# Altium PCB HOL-Nova.PcbDoc
Units mil, origin at the board's own origin, x right, y up, seen from the top; angles counter-clockwise.
Board outline 1832 x 763.78 mil, 4 copper layers (Top Layer, Internal Plane 1, Internal Plane 2, Bottom Layer), stack 61.6 mil thick; 81 components, 40 nets, 278 pads, 61 vias.
Unrouted connection lines stored in the file: 1.
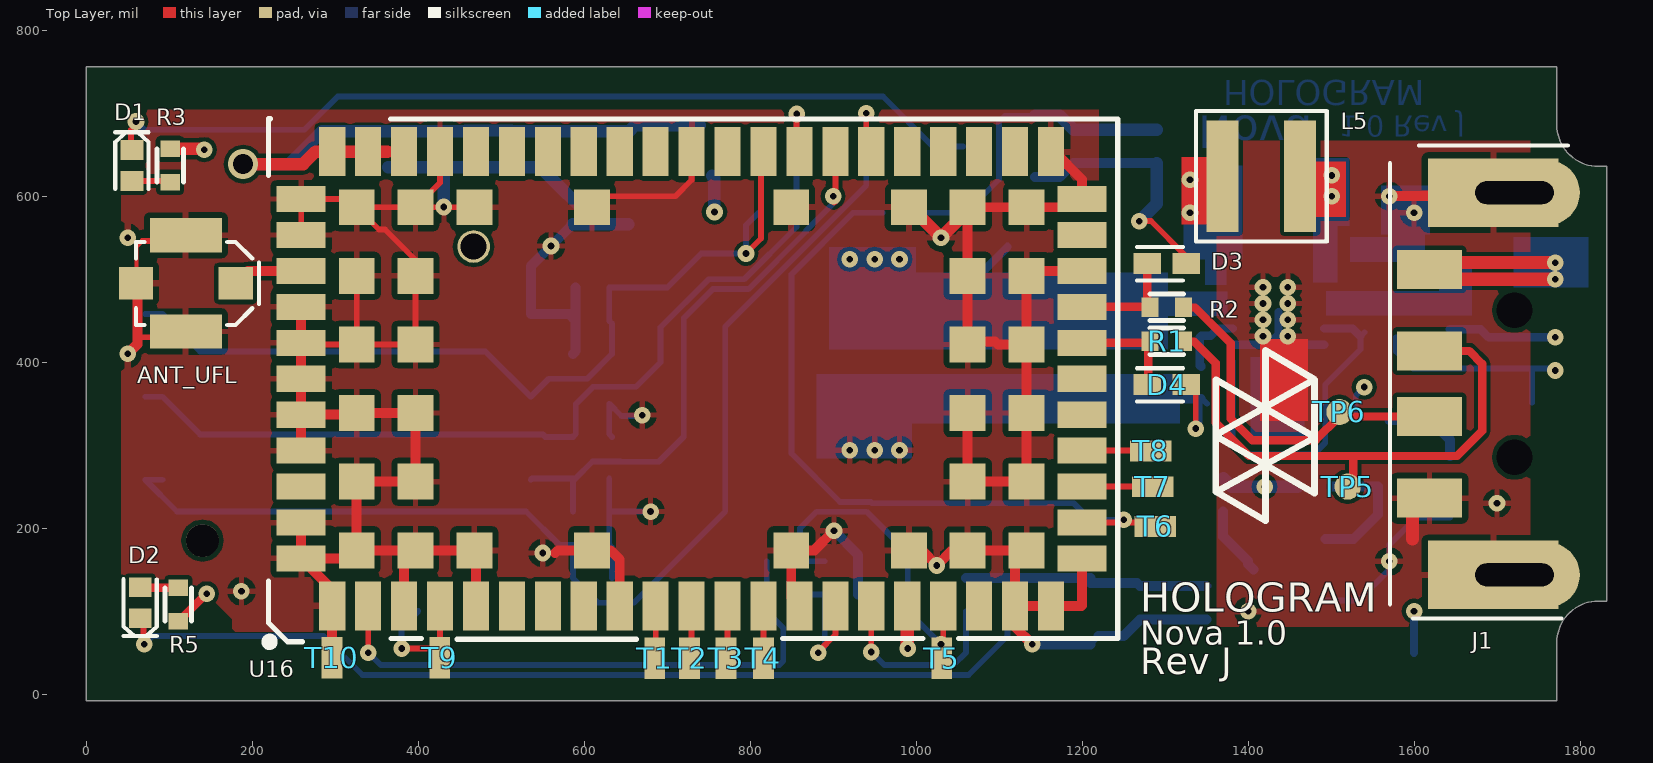
[diagram p0: Top Layer view]
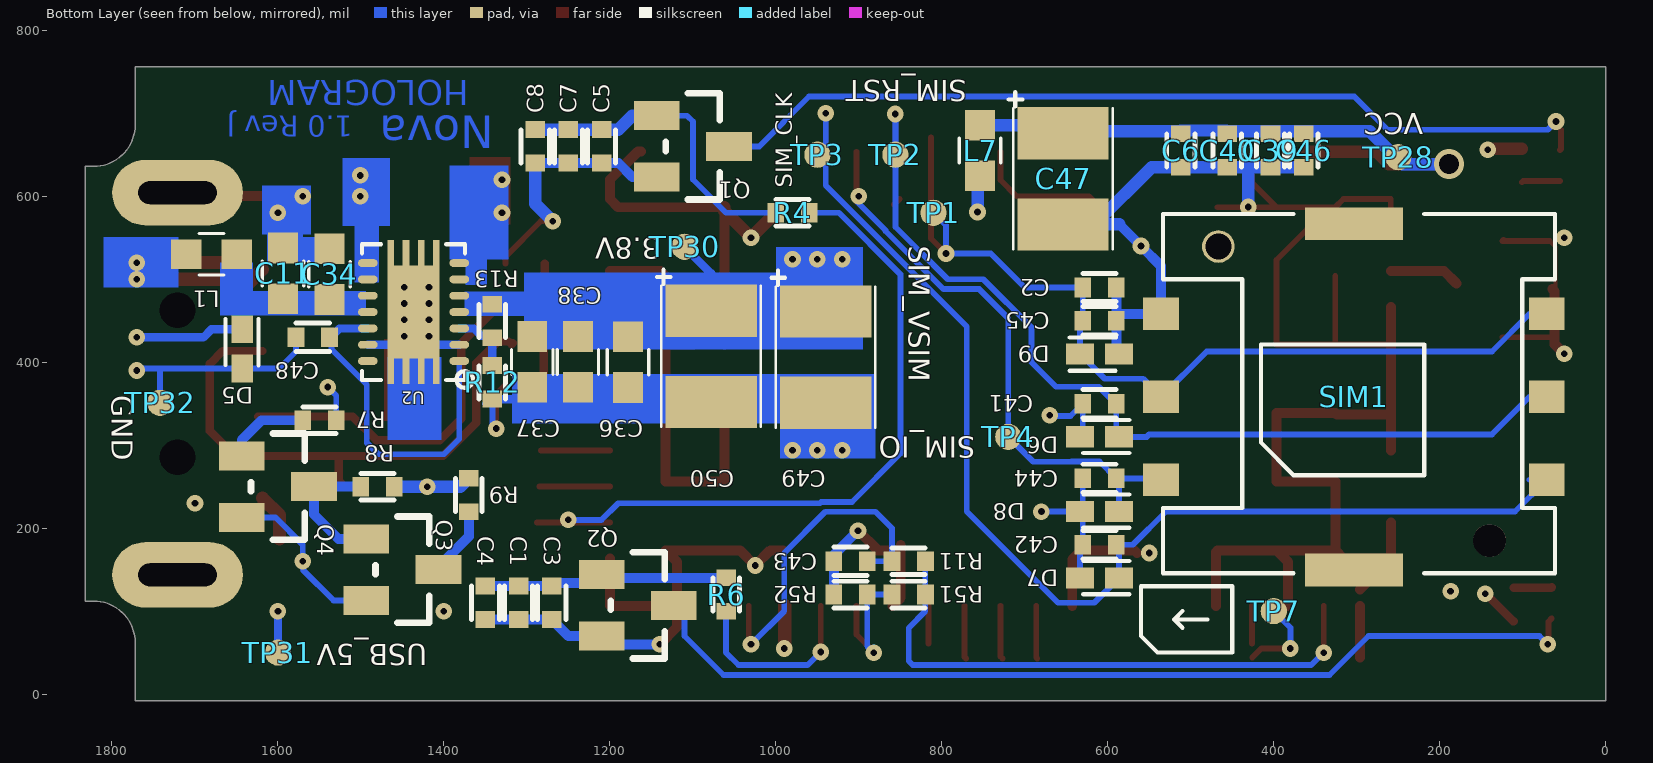
[diagram p1: Bottom Layer view, seen from below]
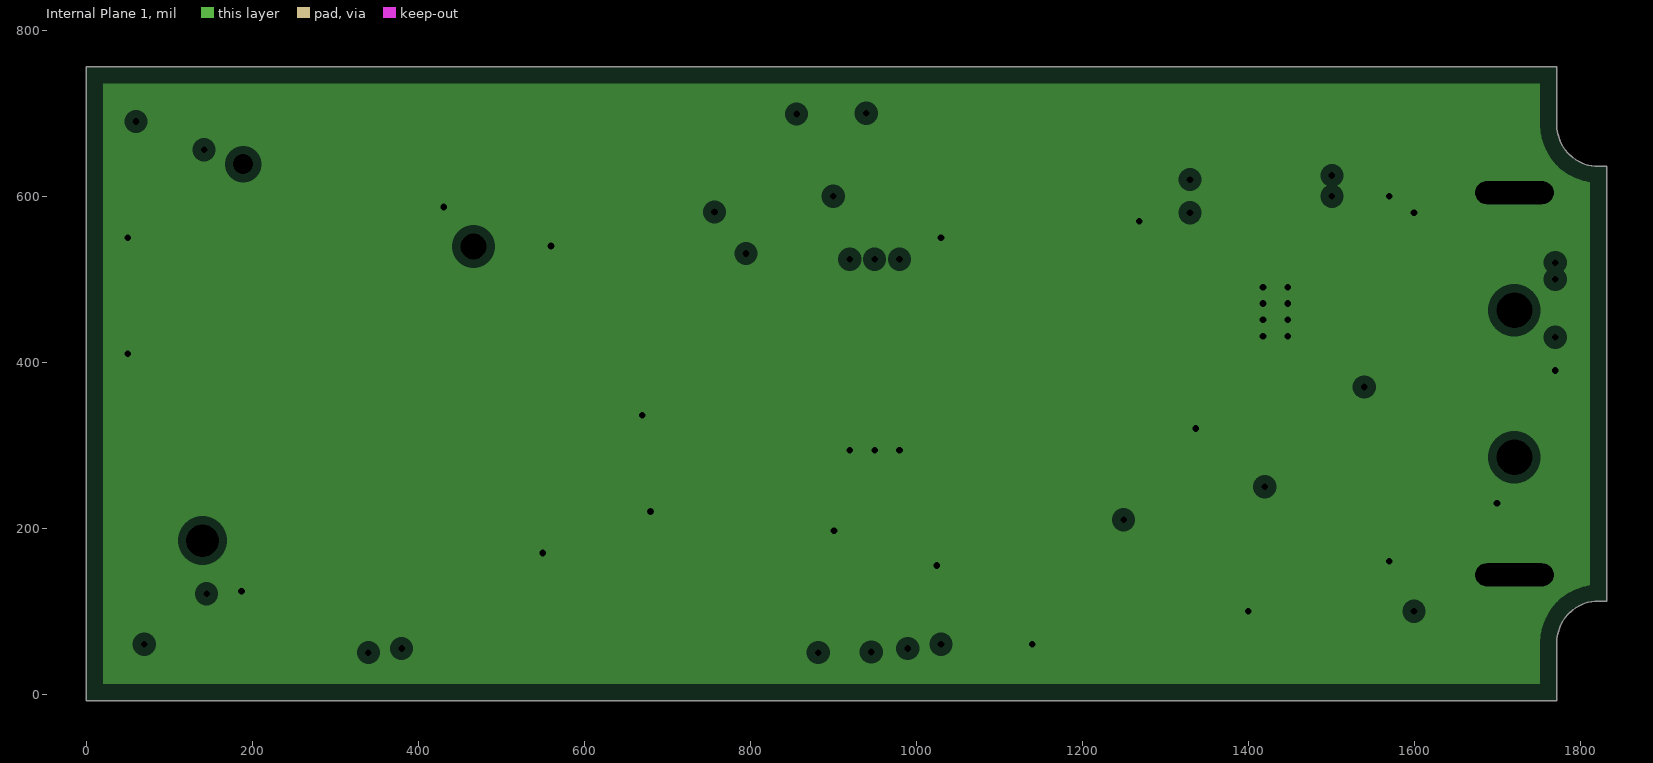
[diagram p2: Internal Plane 1, clearances drawn from the general rule]
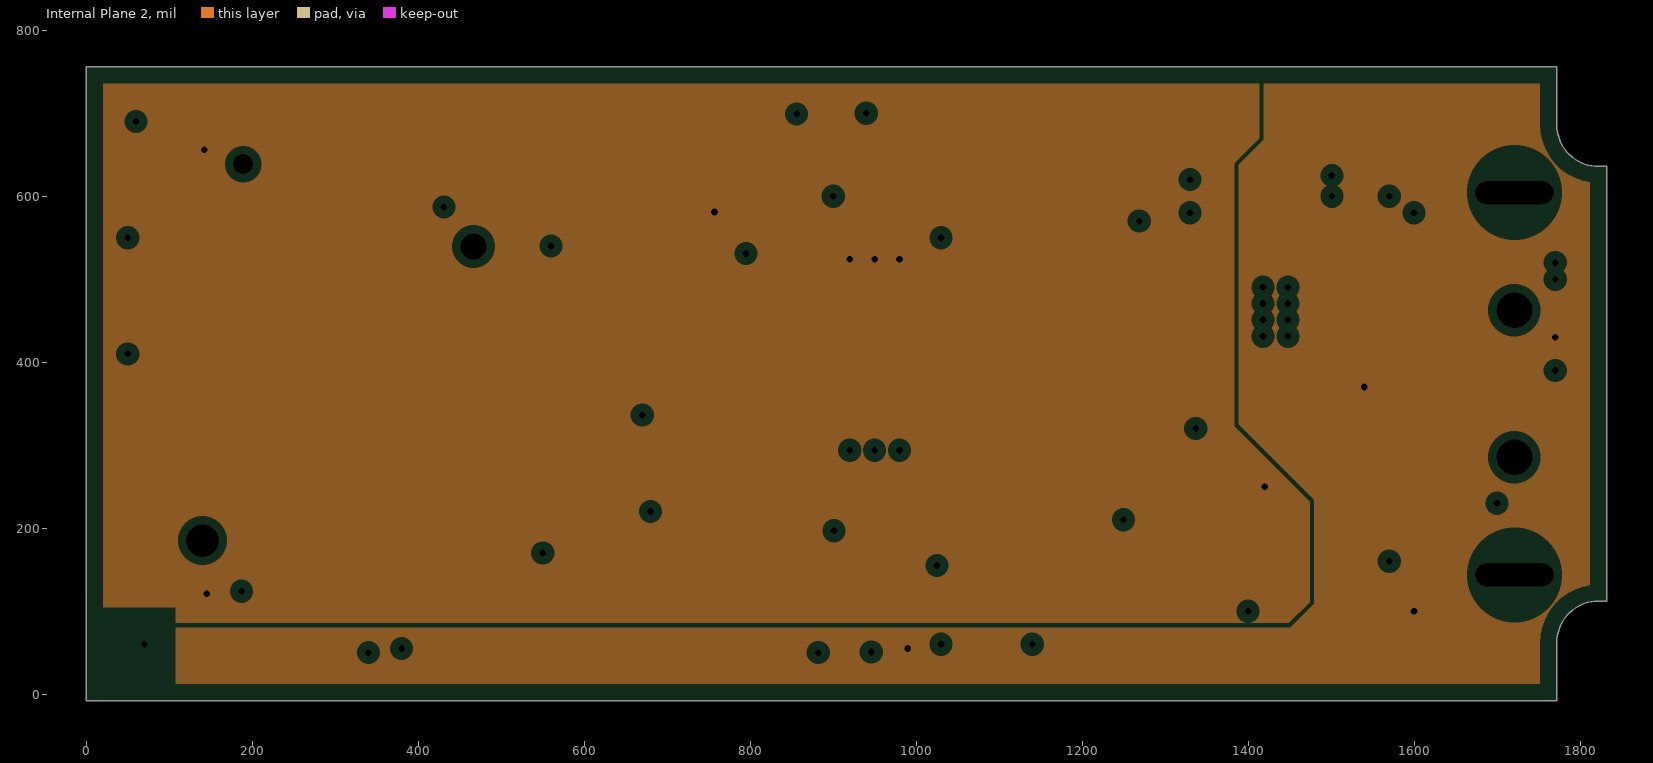
[diagram p3: Internal Plane 2, clearances drawn from the general rule]

## Layer stack, top to bottom
Top Solder: solder mask 0.4, Solder Resist, Dk 3.5
Top Layer: signal copper 1.4
Dielectric 1: prepreg 8, Dk 4.2
Internal Plane 1: plane copper 1.4, net GND
Dielectric 7: core 40, FR4, Dk 4.2
Internal Plane 2: plane copper 1.4, net (Multiple Nets)
Dielectric 6: prepreg 8, Dk 4.2
Bottom Layer: signal copper 1.4
Bottom Solder: solder mask 0.4, Solder Resist, Dk 3.5

## Board outline
0,-7.87 0,755.91 1772,755.91 1772,686 ccw(c1822,686) 1822,636 1832,636 1832,112 1822,112 ccw(c1822,62) 1772,62 1772,-7.87

## Design rules (kind name [scope] priority, off if disabled: settings)
Clearance Clearance_3 [(InComponent('TP13'))] p1: gap=0 ignorepadtopadclearanceinfootprint=FALSE
Clearance Clearance_4 [(InComponent('T1') or InComponent('T2') or InComponent('T3') or InComponent('T4') or InComponent('T5') or InComponent('T6') or InComponent('T7') or InComponent('T8') or InComponent('T10'))] p2: gap=0 ignorepadtopadclearanceinfootprint=FALSE
Clearance Clearance_2 [InComponent('TP20')] p3: gap=0 ignorepadtopadclearanceinfootprint=FALSE
Clearance Clearance_1 [(InNet('GND') AND InComponent('U10'))] p4: gap=5 ignorepadtopadclearanceinfootprint=FALSE except(0: Arc-Hole Track-Hole SMDPad-Hole THPad-Hole Via-Hole Fill-Hole Poly-Hole Region-Hole Text-Hole)
Clearance [All] p5: gap=5 ignorepadtopadclearanceinfootprint=FALSE except(0: Arc-Hole Track-Hole SMDPad-Hole THPad-Hole Via-Hole Fill-Hole Poly-Hole Region-Hole Text-Hole)
ComponentClearance ComponentClearance_2 [(InComponent('JRIGHT_A') OR InComponent('JRIGHT_B') OR InComponent('JRIGHT_C') OR InComponent('JLEFT_B') OR InComponent('JLEFT_A') OR InComponent('SIM1') OR InComponent('TP20') OR InComponent('TP14') OR InComponent('TP2') OR  InComponent('TP25') OR InComponent('TP13')    )] p1: gap=-10 collisioncheckmode=3 verticalgap=10 showdistances=FALSE
ComponentClearance ComponentClearance_1 [InComponent('U420')] p2: gap=-10 collisioncheckmode=3 verticalgap=10 showdistances=FALSE
ComponentClearance [All] p3: gap=10 collisioncheckmode=3 verticalgap=10 showdistances=FALSE
MinimumSolderMaskSliver [All] p1 off: minsoldermaskwidth=5
PlaneClearance [All] p1: clearance=10
PlaneConnect [All] p1: planeconnectstyle=Direct reliefexpansion=20 reliefentries=4 reliefconductorwidth=10 reliefairgap=10
PolygonConnect [All] p1: connectstyle=Relief reliefconductorwidth=7 reliefentries=4 polygonreliefangle="90 Angle" airgapwidth=7
RoutingVias [All] p1: holewidth=8 width=22 viastyle="Through Hole" minholewidth=7 minwidth=10 maxholewidth=100 maxwidth=100
SilkToSilkClearance [All] p1 off: silktosilkclearance=10
SilkToSolderMaskClearance [IsPad] p1 off: minsilkscreentomaskgap=10 clearancetoexposedcopper=TRUE
SolderMaskExpansion [All] p1: expansion=4
Width [All] p1: maxlimit=50 minlimit=5 preferedwidth=10 minimp=50.000000 maximp=50.000000 favimp=50.000000
24 further rules are at their usual default settings.

## Components (designator, comment, footprint, x,y, rotation, side; value= is the part's Value field where it differs from the comment)
ANT_UFL "ANT-A-1JB" UFL 120,495 r180 top
C1 "10 nF" CAP0402 1310,110 r270 bottom
C2 "0.1 uF" CAP0402 610,490 r180 bottom
C3 "56 pf" CAP0402 1270,110 r270 bottom
C4 "15 pf" CAP0402 1350,110 r270 bottom
C5 "10 nF" CAP0402 1210,660 r270 bottom
C6 "0.1 uF" CAP0402 512,655 r270 bottom
C7 "56 pf" CAP0402 1250,660 r270 bottom
C8 "15 pf" CAP0402 1290,660 r270 bottom
C11 "2.2 uF" CAP0603 1594,507 r270 bottom
C34 "10 uF" CAP0603 1538,506 r270 bottom
C36 "22 uF" CAP0603 1178,400 r90 bottom
C37 "22 uF" CAP0603 1293.63,400.37 r90 bottom
C38 "22 uF" CAP0603 1238.63,400.37 r90 bottom
C39 "10 nF" CAP0402 404,655 r270 bottom
C40 "56 pf" CAP0402 456,655 r270 bottom
C41 "47 pF" CAP0402 610,350 r0 bottom
C42 "47 pF" CAP0402 610,180 r0 bottom
C43 "47 pF" CAP0402 910,160 r0 bottom
C44 "47 pF" CAP0402 610,260 r0 bottom
C45 "47 pF" CAP0402 610,450 r180 bottom
C46 "15 pf" CAP0402 364,655 r270 bottom
C47 "330uF" CAP1210POL 654,621 r270 bottom
C48 "0.1 uF" CAP0402 1558,430 r0 bottom
C49 "330uF" CAP1210POL 940,406 r270 bottom
C50 "330uF" CAP1210POL 1078,407 r270 bottom
D1 "LED_0402_VLMB" LED_0402_VISHAY_VLMB 55,637 r270 top
D2 "LED_0402_VLMS" LED_0402_VISHAY_VLMS 65,110 r90 top
D3 "" PESD_0402 1302,519 r180 top
D4 "" PESD_0402 1302,373 r180 top
D5 "" PESD_0402 1643,416 r90 bottom
D6 "" PESD_0402 610,310 r180 bottom
D7 "" PESD_0402 610,140 r180 bottom
D8 "" PESD_0402 610,220 r180 bottom
D9 "" PESD_0402 610,410 r0 bottom
J1 "USB_A_PLUG_MOLEX_0480372200" "USB_A_PLUG_MOLEX_0480372200 - clipped_copper" 1721,374 r180 top locked
L1 "0 ohm" RES0603 1680,530 r180 bottom
L5 "1uH" COILCRAFT_XFL4020 1416,624 r180 top
L7 "FerriteBead 120ohm, 3A" RES0603 754,655 r90 bottom
Q1 "" SOT23 1100,660 r270 bottom
Q2 "" SOT23 1166.5,107 r270 bottom
Q3 "" SOT23 1450,150 r270 bottom
Q4 "" SOT23 1600,250 r270 bottom
R1 "22" RES0402 1302,425 r180 top
R2 "22" RES0402 1302,466 r180 top
R3 "3k" RES0402 101,637 r270 top
R4 "10K" RES0402 980,580 r0 bottom
R5 "3k" RES0402 111,108 r90 top
R6 "10K" RES0402 1060,120 r90 bottom
R7 "10K" RES0402 1550,330 r0 bottom
R8 "10K" RES0402 1480,250 r0 bottom
R9 "470" RES0402 1370,240 r270 bottom
R11 "100K" RES0402 840,160 r180 bottom
R12 "150k" RES0402 1341.63,375.63 r270 bottom
R13 "1M" RES0402 1341.63,449.63 r90 bottom
R51 "100K" RES0402 840,120 r180 bottom
R52 "100K" RES0402 910,120 r180 bottom
SIM1 "SIM_CARD_NANO" SIM_CARD_NANO 140,185 r90 bottom locked
T1 "TESTPAD" TESTPAD 685,43 r90 top locked
T2 "TESTPAD" TESTPAD 727,43 r90 top locked
T3 "TESTPAD" TESTPAD 771,43 r90 top locked
T4 "TESTPAD" TESTPAD 816,43 r90 top locked
T5 "TESTPAD" TESTPAD 1031,43 r90 top locked
T6 "TESTPAD" TESTPAD 1288,202 r0 top locked
T7 "TESTPAD" TESTPAD 1285,250 r0 top locked
T8 "TESTPAD" TESTPAD 1283,293 r0 top locked
T9 "TESTPAD" TESTPAD 426,44 r90 top locked
T10 "TESTPAD" TESTPAD 296,44 r90 top locked
TP1 "TPTP08R" TP08R 810,580 r90 bottom
TP2 "TPTP08R" TP08R 856,650 r90 bottom
TP3 "TPTP08R" TP08R 950,650 r90 bottom
TP4 "TPTP08R" TP08R 720,310 r90 bottom
TP5 "TPTP08R" TP08R 1520,250 r90 top
TP6 "TPTP08R" TP08R 1510,340 r90 top
TP7 "TPTP08R" TP08R 400,100 r90 bottom
TP28 "TPTP08R" TP08R 250,647 r90 bottom
TP30 "TPTP08R" TP08R 1110,539 r90 bottom
TP31 "TPTP08R" TP08R 1600,50 r90 bottom
TP32 "TPTP08R" TP08R 1742,351 r90 bottom
U2 "TPS63020" QFN-14-POWERPAD3X4DSJ 1436.63,460.37 r90 bottom
U16 "SARA-U2XX" SARA 296.4,106.38 r90 top locked

## Footprints (in the part's own frame and the unit in brackets; to place one, negate y for a bottom-side part, rotate by r counter-clockwise, add the part's x,y. Pads: shape width x height; smd on the part's side, far side on the other; paste and mask are expansions set on the pad)
CAP0402 [mm] "Chip Capacitor, 2-Leads, Body 1.00x0.50mm, IPC Medium Density"
  rect 0.515x0.6 smd: 1(-0.513,0) 2(0.513,0)
  silkscreen extent -0.51,-0.43 0.51,0.43, body extent -0.55,-0.3 0.55,0.3, height 0.6
CAP0603 [mil]
  rect 37x36 smd: 1(30.5,0) 2(-30.5,0)
  silkscreen extent -15,-25 15,25, body extent -39,-20 39,20, height 32
CAP1210POL [mil] "Polorized version of CAP1210 showing orientation of cap"
  rect 63x110 smd: 1(-55,0) 2(55,0)
  silkscreen extent -104,-65 85,60, body extent -67,-53 67,53, height 50
COILCRAFT_XFL4020 [mil] "COILCRAFT_XFL4020"
  rect 38.58x133.86 smd: P$1(-46.65,0) P$2(46.65,0)
  silkscreen extent -79,-79 79,79, body extent -80,-80 80,80, height 83
LED_0402_VISHAY_VLMB [mm] "LED_0402_VISHAY_VLMB"
  rect 0.6x0.7 smd: ANODE(0.475,0) CATHODE(-0.475,0)
  silkscreen extent -1.02,-0.51 0.72,0.51, body extent -0.5,-0.25 0.5,0.25, height 0.35
LED_0402_VISHAY_VLMS [mm] "LED_0402_VISHAY_VLMS"
  rect 0.6x0.7 smd: ANODE(0.475,0) CATHODE(-0.475,0)
  silkscreen extent -1.02,-0.51 0.72,0.51, body extent -0.5,-0.25 0.5,0.25, height 0.35
PESD_0402 [mm] "LittleFuse PESD 0402"
  rect 0.85x0.65 smd: 1(-0.6,0) 2(0.6,0)
  silkscreen extent -0.5,-0.5 0.91,0.52, body extent -0.55,-0.3 0.55,0.3, height 0.35
QFN-14-POWERPAD3X4DSJ [mm] "QFN-14-POWERPAD3X4DSJ"
  rrect100% 0.24x0.6 smd mask+0.052: 1(-1.5,-1.4) 3(-0.5,-1.4) 4(0,-1.4) 5(0.5,-1.4) 6(1,-1.4) 7(1.5,-1.4) 8(1.5,1.4) 9(1,1.4) 10(0.5,1.4) 11(0,1.4) 12(-0.5,1.4) 13(-1,1.4) 14(-1.5,1.4)
  rrect100% 0.24x0.6 smd paste+0 mask+0.052: 2(-1,-1.4)
  rect 0.8x0.2 smd mask+0.052: POWERPAD(-1.8,-0.69) POWERPAD(-1.8,-0.23) POWERPAD(-1.8,0.23) POWERPAD(-1.8,0.69) POWERPAD(1.8,-0.69) POWERPAD(1.8,-0.23) POWERPAD(1.8,0.23) POWERPAD(1.8,0.69)
  rect 2.85x1.58 smd paste-5: POWERPAD(0,0)
  silkscreen extent -2.32,-1.82 2.07,1.58, body extent -2,-1.55 2,1.55, height 1
RES0402 [mm] "Chip Resistor, 2-Leads, Body 1.00x0.50mm, IPC Medium Density"
  rect 0.515x0.6 smd: 1(-0.513,0) 2(0.513,0)
  silkscreen extent -0.51,-0.41 0.51,0.41, body extent -0.55,-0.3 0.55,0.3, height 0.35
RES0603 [mil]
  rect 37x36 smd: 1(30.5,0) 2(-30.5,0)
  silkscreen extent -15,-25 15,25, body extent -39,-20 39,20, height 32
SARA [mm] "u-blox SARA cellular module"
  rect 1.5x0.8 smd paste-0.1: 1(0,0) 2(0,-1.1) 3(0,-2.2) 4(0,-3.3) 5(0,-4.4) 6(0,-5.5) 7(0,-6.6) 8(0,-7.7) 9(0,-8.8) 10(0,-9.9) 11(0,-11) 12(0,-12.1) 13(0,-13.2) 14(0,-14.3) 15(0,-15.4) 16(0,-16.5) 17(0,-17.6) 18(0,-18.7) 19(0,-19.8) 20(0,-20.9) 21(0,-22) 33(13.9,-22) 34(13.9,-20.9) 35(13.9,-19.8) 36(13.9,-18.7) 37(13.9,-17.6) 38(13.9,-16.5) 39(13.9,-15.4) 40(13.9,-14.3) 41(13.9,-13.2) 42(13.9,-12.1) 43(13.9,-11) 44(13.9,-9.9) 45(13.9,-8.8) 46(13.9,-7.7) 47(13.9,-6.6) 48(13.9,-5.5) 49(13.9,-4.4) 50(13.9,-3.3) 51(13.9,-2.2) 52(13.9,-1.1) 53(13.9,0)
  rect 0.8x1.5 smd paste-0.1: 22(1.45,-22.95) 23(2.55,-22.95) 24(3.65,-22.95) 25(4.75,-22.95) 26(5.85,-22.95) 27(6.95,-22.95) 28(8.05,-22.95) 29(9.15,-22.95) 30(10.25,-22.95) 31(11.35,-22.95) 32(12.45,-22.95) 54(12.45,0.95) 55(11.35,0.95) 56(10.25,0.95) 57(9.15,0.95) 58(8.05,0.95) 59(6.95,0.95) 60(5.85,0.95) 61(4.75,0.95) 62(3.65,0.95) 63(2.55,0.95) 64(1.45,0.95)
  rect 1.1x1.1 smd paste-0.025: 65(1.7,-0.75) 66(3.8,-0.75) 67(5.9,-0.75) 68(8,-0.75) 69(10.1,-0.75) 70(12.2,-0.75) 71(1.7,-2.55) 72(3.8,-2.55) 73(5.9,-2.55) 74(8,-2.55) 75(10.1,-2.55) 76(12.2,-2.55) 77(1.7,-4.35) 78(12.2,-4.35) 79(1.7,-7.95) 80(12.2,-7.95) 81(1.7,-14.05) 82(12.2,-14.05) 83(1.7,-17.65) 84(12.2,-17.65) 85(1.7,-19.45) 86(3.8,-19.45) 87(5.9,-19.45) 88(8,-19.45) 89(10.1,-19.45) 90(12.2,-19.45) 91(1.7,-21.25) 92(3.8,-21.25) 93(5.9,-21.25) 94(8,-21.25) 95(10.1,-21.25) 96(12.2,-21.25)
  silkscreen extent -1.15,-24.04 14.91,1.97, body extent -1.05,-24.05 14.95,1.95, height 3.03
SIM_CARD_NANO [mm] "SIM_CARD_NANO"
  round 1 hole 1: 1(0,0)
  round 1 hole 0.8: 1(9,8.3)
  rect 1x1.1 smd: C1(6.94,-1.75) C2(4.4,-1.75) C3(1.86,-1.75) C5(6.94,10.05) C6(4.4,10.05) C7(1.86,10.05)
  rect 1x3 smd: MTG1(9.7,4.15) MTG2(-0.9,4.15)
  Top Layer pour cut-out: 6.34,8.8 7.54,8.8 7.54,7.8 6.34,7.8 6.34,8.8
  Top Layer pour cut-out: 3.8,8.8 5,8.8 5,7.8 3.8,7.8 3.8,8.8
  Top Layer pour cut-out: 1.26,8.8 2.46,8.8 2.46,7.8 1.26,7.8 1.26,8.8
  Top Layer pour cut-out: 7.54,0.2 6.34,0.2 6.34,1.2 7.54,1.2 7.54,0.2
  Top Layer pour cut-out: 5,0.2 3.8,0.2 3.8,1.2 5,1.2 5,0.2
  Top Layer pour cut-out: 2.46,0.2 1.26,0.2 1.26,1.2 2.46,1.2 2.46,0.2
  silkscreen extent -1,-2 10,10, body extent -1.03,-1.95 9.81,10.25, height 1.35
SOT23 [mil]
  rect 35x55 smd: 1(-37,-43.5) 2(37,-43.5) 3(0,43.5)
  silkscreen extent -64,-32 64,33, body extent -59,-51 59,51, height 44
TESTPAD [mil] "TESTPAD"
  rect 50x25 smd paste-393.7: P$1(0,0)
TP08R [mil] "TP08R"
  rrect100% 31.5x31.5 smd paste-393.7: TP(0,0)
UFL [mm] "UFL"
  rect 2.2x1.05 smd: GND1(0,-1.475) GND2(0,1.475)
  rect 1.05x1 smd: GND3(1.525,0) SIGNAL(-1.525,0)
  silkscreen extent -2.24,-1.27 1.52,1.27, body extent -1.55,-1.5 1.55,1.5, height 1.25
"USB_A_PLUG_MOLEX_0480372200 - clipped_copper" [mm] "Clipped Pin USB_A_PLUG_MOLEX_0480372200"
  round 0 hole 1.1 unplated mask+0.102: 0(0,2.25) 0(0,-2.25)
  rect 2x1.2 smd: D+(2.6,1) D-(2.6,-1) GND(2.6,3.5) VCC(2.6,-3.5)
  oval 4x2 hole 0.7 slot 2.4 at 0 deg: GND(0,5.85) GND(0,-5.85)
  rect 4x2.1 smd: GND(0.65,5.85) GND(0.65,-5.85)
  silkscreen extent -1.63,-7.29 3.81,7.19, body extent -17.86,-6.02 3.09,6.03, height 2.09

## Part data
ANT_UFL: MPN=A-1JB, Internal PN=CON-0006, MFG=Amphenol
C1 C5 C39: library part CAP10nF_0402, "CAPACITOR, American symbol", MPN=GRM155R71C103KA01D, Internal PN=CAP-0016, MFG=MURATA, PKG=0402
C2 C6 C48: library part CAP0.1uF_0402, "CAPACITOR, American symbol", MPN=GRM155R61C104KA88D, Internal PN=CAP-0004, MFG=MURATA, PKG=0402
C3 C7 C40: library part CAP56pF_0402, "CAPACITOR, American symbol", MPN=C0402C560J5GACTU, PACKAGE=0402, Internal PN=CAP-0009, MFG=KEMET
C4 C8 C46: library part CAP15pF_0402, "CAPACITOR, American symbol", MPN=04025A150JAT2A, PACKAGE=0402, Internal PN=CAP-0011, MFG=AVX/ELCO
C11: library part CAP2.2uF_0603, "Ceramic Capacitor SMD", MPN=CL10A225MQ8NNNC, PACKAGE=0603, Internal PN=CAP-0002, MFG=SAMSUNG
C34: library part CAP10uF_0603, "Ceramic Capacitor SMD", MPN=GRM188R60J106ME84D, Internal PN=CAP-0007, MFG=Murata
C36 C37 C38: library part CAP22uF_0603, "Ceramic Capacitor SMD", MPN=GRM188R60J226MEA0D, PACKAGE=0603, Internal PN=CAP-0008, MFG=MURATA
C41 C42 C43 C44 C45: library part CAP47pf_0402, "CAPACITOR, American symbol", MPN=04025A470JAT2A, Internal PN=CAP-0010, MFG=AVX, PKG=0402
  C43: NP="Not Populated"
C47 C49 C50: library part CAP330uF_1210P, "Capacitor", MPN=F950J337MBAAQ2, PACKAGE=1210, Internal PN=CAP-0012, MFG=AVX
D1: "LED, Vishay Blue 0402", Color=Blue, MPN=VLMB1500-GS08, PACKAGE=0402, Internal PN=DIO-0007, MFG=VISHAY
D2: "LED, Vishay Red 0402", Color=Red, MPN=VLMS1500-GS08, PACKAGE=0402, Internal PN=DIO-0008, MFG=VISHAY
D3 D4 D5 D6 D7 D8 D9: library part PESD_14V, "DIODE,ZENER VOLTAGE SUPPRESSOR,+/-14V", MPN=PESD0402-140, Internal PN=DIO-0009, MFG=Littlefuse
J1: "Connector, USB A, Plug, 0480372200", MPN=0480372200, PACKAGE=CUSTOM, Internal PN=CON-0008, MFG=MOLEX, PARTNUM=0480372200, USB-A="USB-A Plug"
L1: library part RES0R_0603, "Resistor, 0 ohm, 0603 case", MPN=RC0603JR-070RL, PACKAGE=0603, Internal PN=RES-0020, MFG=YAEGO
L5: library part INDUCTOR_1UH_XFL4020-102MEC, MPN=XFL4020-102MEC, Internal PN=IND-0003, MFG=Coilcraft
L7: library part FerriteBead_120ohm_3A, MPN=BLM18KG121TN1D, Internal PN=IND-0005, MFG=Murata
Q1 Q2 Q3 Q4: library part TSTR_3904_SOT23, "TSTR,NPN 3904, SOT23", MPN=MMBT3904LT1G, Internal PN=IC-0014, MFG="ON Semiconductor"
R1 R2: library part RES22R_0402, "Resistor, 22 ohm, 0402 case, 1%", MPN=RC0402FR-0722RL, PACKAGE=0402, Internal PN=RES-0016, MFG=YAEGO
R3 R5: library part RES3K_0402, "Resistor, 3K ohm, 0402 case, 1%", MPN=RC0402FR-073KL, PACKAGE=0402, Internal PN=RES-0019, MFG=YAEGO
R4 R6 R7 R8: library part RES10K_0402, "Resistor, 10k ohm, 0402", MPN=RC0402JR-0710KL, PACKAGE=0402, Internal PN=RES-0008, MFG=YAEGO
R9: library part RES470R_0402, "Resistor, 470 ohm, 0402 case, 1%", MPN=ERJ-2GEJ471X, PACKAGE=0402, Internal PN=RES-0006, MFG=PANASONIC
R11 R51 R52: library part RES100K_0402, "Resistor, 100k ohm, 0402", MPN=ERJ-2GEJ104X, PACKAGE=0402, Internal PN=RES-0003, MFG=PANASONIC
  R11 R52: NP="Not Populated"
R12: library part RES150K_0402, "Res, 150k ohm, 0402 case, 1%", MPN=RC0402FR-07150KL, PACKAGE=0402, Internal PN=RES-0004, MFG=YAEGO
R13: library part RES1M_0402, "Resistor, 1M ohm, 0402 case, 1%", MPN=RC0402FR-071ML, PACKAGE=0402, Internal PN=RES-0014, MFG=YAEGO
SIM1: MPN=SIM8050-6-0-14-01-A, PACKAGE=CUSTOM, CLK=CLK, GND=GND, I/O=I/O, Internal PN=CON-0007, MFG="GLOBAL CONNECTOR TECHNOLOGY", RST=RST, VCC=VCC, Vpp=Vpp
TP1 TP2 TP3 TP4 TP5 TP6 TP7 TP28 TP30 TP31 TP32: "Test pad", MPN=N/A, MFG=N/A
U2: "Regulator, Boost Buck, 3A", MPN=TPS63020DSJ, PACKAGE=QFN_14_3x4, Internal PN=IC-0013, MFG=TI
U16: MPN=SARA-U260-00S, Internal PN=IC-0007, MFG=U-BLOX

## Via types
v1: diameter 20/20 (per signal layer), hole 8, Top Layer to Bottom Layer, tented top, 60 vias
v2: diameter 36/36 (per signal layer), hole 24, Top Layer to Bottom Layer, 1 vias

## Nets (pads, with @x,y where several pads share a name; then routed paths per layer and width w, separated by ;. In a path a pad name is that pad's centre, name@x,y a point inside that pad or via, vN(x,y) a via of type N, cw(c..) or ccw(c..) an arc to the next point about the centre after c; other vN are vias at no path point)
+3.8V: C36.1 C37.1 C38.1 C49.1 C50.1 L7.2 R3.1 R5.1 R8.1 R9.1 R13.2 TP30.TP U2.4 U2.5 | length 398.8
  Top Layer w10: R5.1 111.82,87.82 v1(145,121)
  Top Layer w15: R3.1 140.82,657.18 v1(142,656)
  Bottom Layer w10: C50.1 1078,507 TP30.TP
  Bottom Layer w15: L7.2 757,621.5 v1(757,581) ; C37.1@1293.63,431.87 1293.63,456.63 1307.55,470.55 R13.2@1343.63,470.55 ; R9.1 1380.18,250 v1(1420,250) R8.1
  other v1: 920,524 950,524 980,524
GND: ANT_UFL.GND1 ANT_UFL.GND2 ANT_UFL.GND3 C1.2 C2.2 C3.2 C4.2 C5.2 C6.2 C7.2 C8.2 C11.2 C34.2 C36.2 C37.2 C38.2 C39.2 C40.2 C41.2 C42.2 C43.2 C44.2 C45.2 C46.2 C47.2 C48.2 C49.2 C50.2 D3.1 D4.1 D5.1 D6.1 D7.1 D8.1 D9.1 J1.GND Q1.2 Q2.2 Q3.2 Q4.2 R12.2 R52.1 SIM1.C5 T10.P$1 TP32.TP U2.2 U2.13 U2.POWERPAD U16.1 U16.3 U16.5 U16.9 U16.14 U16.20 U16.21 U16.22 U16.30 U16.32 U16.33 U16.43 U16.50 U16.54 U16.55 U16.57 U16.58 U16.59 U16.60 U16.61 U16.63 U16.64 U16.65 U16.66 U16.67 U16.68 U16.69 U16.70 U16.71 U16.72 U16.73 U16.74 U16.75 U16.76 U16.77 U16.78 U16.79 U16.80 U16.81 U16.82 U16.83 U16.84 U16.85 U16.86 U16.87 U16.88 U16.89 U16.90 U16.91 U16.92 U16.93 U16.94 U16.95 U16.96 | length 6505
  Top Layer w5: ANT_UFL.GND3@60.46,488.07 60.46,539.03 67.57,546.14
  Top Layer w7: 61.49,430 ANT_UFL.GND2@124.5,430 ; 67.57,546.14 124.5,546.14 ANT_UFL.GND1@123.32,547.32 ; U16.55 U16.54 316.09,596.54 U16.70 ; U16.58@260.97,421.34 U16.68 ; U16.69 U16.68 ; U16.50 426.32,616.22 U16.76 ; U16.78 U16.76 ; U16.80 622.7,600 710,600 729.47,619.47 U16.43 ; U16.82@850.85,596.69 U16.82@857.54,590 ; U16.84@996.67,589.96 U16.84@1006.88,573.12 ; v1@1264,570 v1(1269,570) 1283,570 1325.62,527.38 D3.1 ; D4.1 1337,361.62 v1(1337,320) ; U16.68 U16.74 396.8,523.2 360,560 352.62,560 U16.70 ; U16.70 U16.76
  Top Layer w12: v1(50,410) 61.49,421.49 61.49,430 61.49,485.1 ANT_UFL.GND3@64.46,488.07 ; U16.63 U16.64 ; U16.61 U16.60 ; U16.57 U16.60 ; T10.P$1 296.4,44.4 U16.1 ; U16.1@296.4,126.06 U16.64 ; U16.3 383.02,159.53 U16.71 ; U16.5 469.63,171.34 U16.77 U16.71 ; 565,170 568.31,173.31 631.69,173.31 642.86,162.14 U16.9 ; U16.81 877.31,173.31 v1(901,197) ; U16.81@849.55,180 849.55,116.22 U16.14 ; U16.83 1006.69,173.31 v1(1025,155) 1043.31,173.31 U16.91 1119.24,159.53 U16.20 ; U16.87@1062.15,338.66 1062.15,255.98 U16.92 U16.94 ; U16.90@1062.15,582.15 1062.15,421.34 1065.81,425 1095,425 1098.66,421.34 U16.94 ; U16.90@1062.15,586.69 1190.1,586.69 U16.32 1199.94,620.06 1166.38,653.62 U16.33 ; v1(1140,60) 1119.24,80.76 U16.20 ; U16.22 1199.94,106.94 1199.38,106.38 U16.20 ; U16.30 1138.92,509.92 U16.95 U16.94 ; v1(1570,600) 1669.72,600 1679.72,590 1694.72,605 J1.GND@1695.41,604.32 ; U16.64 316.09,163.47 U16.65 ; U16.60 323.96,336.69 U16.67 U16.73 U16.72 U16.66 U16.65 ; U16.65 U16.71
  Top Layer w15: U16.84@1006.88,573.12 v1(1030,550) 1062.15,582.15 U16.90@1062.15,586.69
  Top Layer w16: 1598,187 1598,215.57 J1.GND@1618.64,236.2
  Bottom Layer w7: C44.2 C42.2 633.62,176.56 D7.1 ; D8.1 v1(680,220) ; D6.1 630.18,313.44 C41.2 644.95,335.23 v1@670,335.23 ; v1@913.56,287.56 v1(920,294) ; v1@1024.82,155.18 v1(1025,155) ; v1@1140,60.18 v1@1140.18,60 ; Q2.2@1210,60 Q2.2@1219.82,69.82 ; v1(1337,320) 1341.63,324.63 1341.63,355.19 R12.2 ; R12.2@1343.63,356.67 R12.2@1350.51,349.79 ; Q3.2 1533,113 1570,150 v1(1570,160) 1570,180 1603,213 Q4.2 ; C48.2 1578.18,412.82 1598.62,392.38 D5.1 1742,392.38 ; TP32.TP 1742,392.38 ; v1(1770,390) 1767.62,392.38 1742,392.38
  Bottom Layer w10: C37.2@1293.63,368.87 1307.31,355.19 R12.2@1341.63,355.19 ; R12.2@1341.63,356.67 R12.2@1343.63,356.67 ; U2.2 1424.26,421 1436.63,433.37 U2.POWERPAD@1436.63,437.37 ; U2.POWERPAD@1436.63,460.37 U2.POWERPAD@1436.63,437.37 ; U2.13 1453,421 U2.POWERPAD@1436.63,437.37
  Bottom Layer w12: 586,566 v1(560,540) 535.67,515.67 SIM1.C5 581.59,458.23 C45.2 ; D9.1 589.82,413.44 C45.2 ; C2.2 C45.2 ; v1(901,197) 930.18,167.82 C43.2 R52.1 ; v1@1140.18,60 Q2.2@1210,60 ; Q1.2 1173,623 1189.82,639.82 C5.2 C7.2 C8.2 ; Q2.2@1219.82,69.82 1250,69.82 C3.2 C1.2 C4.2
  Bottom Layer w15: C46.2 C39.2@403,634.82 ; C39.2 431,634.82 ; v1(431,587) 431,634.82 ; C6.2@508,634.82 C40.2 431,634.82 ; C6.2 547.18,634.82 C47.2@614,568 ; 586,566 C47.2@653,566 ; v1(1269,570) 1290,591 C8.2
  other v1: 1400,100 187,124 550,170 1700,230 950,294 980,294 670,336.23 1418,431.32 1448,431.32 1418,451 1448,451 1418,470.68 1448,470.68 1418,490.37 1448,490.37 50,550 1600,580
GPIO1: R6.1 U16.16 | length 232.2
  Top Layer w7: v1(946.01,50.7) U16.16
  Bottom Layer w7: v1(946.01,50.7) 961.71,35 1045,35 1060,50 R6.1
GPIO2: R4.1 T6.P$1 U16.23 | length 877.7
  Top Layer w7: U16.23 T6.P$1@1288,206.77
  Bottom Layer w7: R4.1 923.98,580 850,506.02 850,290 908.35,231.65 945.32,231.65 946.97,230 1190,230 1210,210 v1(1250,210)
GPIO3: T7.P$1 U16.24 | length 85.1
  Top Layer w7: U16.24 T7.P$1@1285,250.08
GPIO4: T8.P$1 U16.25 | length 83.1
  Top Layer w7: U16.25 T8.P$1@1283,293.39
NetC1_1: C1.1 C3.1 C4.1 Q2.1 R6.2 | length 291.6
  Bottom Layer w7: C3.1@1266.18,134 C3.1
  Bottom Layer w12: R6.2 Q2.1@1210,140.18 ; Q2.1@1210,134 C3.1@1266.18,134 ; C3.1 C1.1 C4.1
NetC5_1: C5.1 C7.1 C8.1 Q1.1 R4.2 | length 386.3
  Bottom Layer w7: R4.2 1060,580 1100,620 1100,690 1107,697 Q1.1
  Bottom Layer w15: Q1.1 1173,697 1189.82,680.18 C5.1 C7.1 C8.1
NetC48_1: C48.1 U2.1 U2.12 | length 419
  Bottom Layer w7: U2.1 1381.51,307.49 1400,289 1479,289 1493,303 1493,373 1535.5,415.5 1535.5,431.22 C48.1@1540.28,436
  Bottom Layer w10: U2.12 1526.04,440.68 C48.1@1535.5,431.22
NetD1_ANODE: D1.ANODE R3.2 | length 46.6
  Top Layer w7: D1.ANODE 99.52,618.3 R3.2
NetD1_CATHODE: D1.CATHODE Q1.3 | length 1066.8
  Top Layer w7: 54,680 54,656.7 D1.CATHODE
  Bottom Layer w7: v1(60,690) 70,680 263,680 303,720 960,720 1020,660 Q1.3
NetD2_ANODE: D2.ANODE R5.2 | length 46.2
  Top Layer w10: D2.ANODE 65.52,128.18 R5.2
NetD2_CATHODE: D2.CATHODE Q2.3 | length 1136
  Top Layer w7: D2.CATHODE 69,87.3 69,70
  Bottom Layer w7: v1(70,60) 80,70 286,70 333,23 1063,23 1110,70 Q2.3@1110,100
NetJ1_VCC: J1.VCC L1.2 | length 285.9
  Top Layer w16: J1.VCC 1633.43,497 1636.43,500 v1(1770,500) ; J1.VCC@1642.84,520 v1(1770,520)
NetL5_P$1: L5.P$1 U2.8 U2.9
  other v1: 1501,600 1501,625
NetL5_P$2: L5.P$2 U2.6 U2.7
  other v1: 1330,580 1330,620
NetQ3_1: Q3.1 Q4.3 R8.2 | length 165
  Bottom Layer w12: Q3.1 1527,187 1556.5,216.5 Q4.3 R8.2
NetQ3_3: Q3.3 R9.2 | length 84.9
  Bottom Layer w12: R9.2 1370,190 1399.82,160.18 1399.82,156.68 Q3.3
NetQ4_1: Q4.1 R7.2 | length 102.6
  Bottom Layer w12: R7.2 1620,330 1643.5,306.5 Q4.1
NetR12_1: R12.1 R13.1 U2.3 | length 79.2
  Bottom Layer w10: R12.1@1341.63,395.55 R12.1 R13.1 R13.1@1341.63,430.19 ; R12.1@1343.63,394.07 R12.1@1343.63,395.55 ; R13.1@1343.63,430.19 1343.63,431.67 1354.93,431.67 1363.94,440.68 U2.3
SIM_DET: U16.42
UBLOX_1.8V_SUPPLY: T9.P$1 TP7.TP U16.4 | length 149.2
  Top Layer w7: v1(380,55) 415,55 T9.P$1 ; T9.P$1@426.32,61 U16.4
  Bottom Layer w7: v1(380,55) 380,80 TP7.TP
UBLOX_ANT: ANT_UFL.SIGNAL U16.56 | length 85.1
  Top Layer w12: ANT_UFL.SIGNAL 194.96,509.92 U16.56
UBLOX_CTS: T2.P$1 U16.11 | length 64.4
  Top Layer w7: T2.P$1 729.47,45.47 U16.11
UBLOX_PWR_ON: R51.1 R52.2 U16.15 | length 173.8
  Top Layer w7: v1(882,50) 882,51 902.7,71.7 U16.15
  Bottom Layer w7: R51.1 R52.2 889.82,57.82 v1(882,50) v1@882,56
UBLOX_RESET_N: C43.1 R11.1 T5.P$1 U16.18 | length 402.1
  Top Layer w7: v1(1030,60) 1032.62,62.62 U16.18
  Bottom Layer w7: C43.1 R11.1 860.18,199.82 880,219.65 940.35,219.65 990,170 990,100 v1(1030,60)
UBLOX_RTS: T1.P$1 U16.10 | length 63.9
  Top Layer w7: T1.P$1 686.17,44.17 U16.10
UBLOX_RXD: T4.P$1 U16.13 | length 45.4
  Top Layer w7: T4.P$1@816.09,61 U16.13
UBLOX_SARA_USB_D_N: D4.2 R1.2 U16.28 | length 153.4
  Top Layer w10: U16.28@1179.94,423.31 U16.28 1279.52,423.31 R1.2@1279.82,423 ; D4.2 1279.82,374.44 R1.2@1279.82,423 ; R1.2 R1.2@1279.82,423
UBLOX_SARA_USB_D_P: D3.2 R2.2 U16.29 | length 151.7
  Top Layer w10: U16.29@1179.94,466.61 U16.29 1277.76,466.61 1278.38,466 D3.2
UBLOX_SIM_CLK: C42.1 D7.2 SIM1.C3 TP3.TP U16.38 | length 1454.1
  Top Layer w7: v1(940,700) 940,659.63 U16.38
  Bottom Layer w7: SIM1.C3@91.77,258.23 SIM1.C3 109.33,220 530,220 570,180 C42.1 586.38,176.56 D7.2 616.38,110 660,110 770,220 770,442.99 940,612.99 v1(940,700)
UBLOX_SIM_IO: C44.1 D8.2 SIM1.C7 TP4.TP U16.39 | length 691.9
  Top Layer w7: v1@901,592 902.7,593.7 U16.39
  Bottom Layer w7: SIM1.C7 537.44,260 C44.1 ; D8.2 586.38,256.56 C44.1 ; v1@901,592 868,559 868,558.03 797.97,488 754.97,488 720,453.03 TP4.TP 690,280 644.15,280 643.84,280.31 610.13,280.31 C44.1
  other v1: 900,600
UBLOX_SIM_RST: C41.1 D6.2 SIM1.C2 TP2.TP U16.40 | length 1144.5
  Top Layer w7: v1(856,699) 856,657.02 U16.40
  Bottom Layer w7: SIM1.C2 91.77,358.23 137,313 550,313 553,310 D6.2 589.82,313.44 C41.1 590.59,350 610.9,370.31 662.31,370.31 692,400 692,442 750,500 793,500 856,563 TP2.TP v1(856,699) v1@856,705
UBLOX_SIM_VSIM: C2.1 C45.1 D9.2 SIM1.C1 SIM1.C6 TP1.TP U16.41 | length 1090.9
  Top Layer w7: v1(795,531) 813.09,549.09 U16.41@813.09,670.62
  Bottom Layer w7: SIM1.C1 91.77,458.23 137,413 480.9,413 SIM1.C6 557.44,380 603.62,380 D9.2 633.62,446.56 C45.1 C2.1 700,490 741,531 v1(795,531) 795,565 TP1.TP
UBLOX_TXD: T3.P$1 U16.12 | length 64.1
  Top Layer w7: T3.P$1 772.78,44.78 U16.12
UBLOX_V_BCKP: R11.2 R51.2 U16.2 | length 693.1
  Top Layer w7: U16.2 339.71,50.29 v1(340,50)
  Bottom Layer w7: v1(340,50) 355,35 835,35 840,40 840,79.82 820,99.82 R11.2@820,160
UBLOX_VCC: C6.1 C39.1 C40.1 C46.1 C47.1 L7.1 TP28.TP U16.51 U16.52 U16.53 | length 740.6
  Top Layer w15: v2@199,638.62 261.4,638.62 276.4,653.62 363.02,653.62
  Bottom Layer w15: v2(189,638.62) 244.62,638.62 284.18,678.18 456,678.18 457,679.18 512,679.18 513.18,678 654,678 661.5,685.5 L7.1@739,685.5
USB_5V: C11.1 C34.1 D5.2 L1.1 R7.1 TP31.TP U2.10 U2.11 U16.17 | length 285.8
  Top Layer w16: v1@989.32,55.68 U16.17
  Bottom Layer w7: R7.1 1529.82,359.82 v1(1540,370)
  Bottom Layer w10: TP31.TP v1(1600,100) ; D5.2 1680.38,439.62 1690,430 v1(1770,430)
  Bottom Layer w12: C11.1@1593,474.5 C11.1@1600,467.5
  other v1: 990,55
USB_IN_D_N: J1.D- R1.1 TP5.TP | length 664.2
  Top Layer w10: R1.1@1317,423 R1.1@1318.59,421.41 ; R1.1 1335,425 1361,399 1361,327.18 1401.18,287 1526.59,287 ; TP5.TP 1526.59,256.59 1526.59,287 ; J1.D- 1666.63,413.37 1682,398 1682,317 1652,287 1526.59,287
USB_IN_D_P: J1.D+ R2.1 TP6.TP | length 433.3
  Top Layer w10: R2.1 1336,466 1379,423 1379,332 1405,306 1481.37,306 1510,334.63 J1.D+ J1.D+@1624,334.63
pads on no net: J1.0 SIM1.1 SIM1.MTG1 SIM1.MTG2 U2.14 U16.6 U16.7 U16.8 U16.19 U16.26 U16.27 U16.31 U16.34 U16.35 U16.36 U16.37 U16.44 U16.45 U16.46 U16.47 U16.48 U16.49 U16.62

## Polygon pours and split planes (outlines as drawn)
GND on Top Layer "TOP_GND_FILL" (solid, remove dead copper, pour order 4): 42,704 1220,704 1220,77 176,75 176,90 151,115 42,114
GND on Top Layer "TOP_GND_FILL" (solid, remove dead copper, pour order 2): 1362,667 1740,667 1740,81 1362,81
GND on Internal Plane 1 (split plane): 1751.9,686 1751.93,685.75 1752.25,679.13 1753.26,672.33 1754.93,665.66 1757.25,659.18 1760.19,652.96 1763.73,647.06 1767.82,641.54 1772.44,636.44 1777.54,631.82 1783.06,627.73 1788.96,624.19 1795.18,621.25 1801.66,618.93 1808.33,617.26 1811.9,616.73 1811.9,131.27 1808.33,130.74 1801.66,129.07 1795.18,126.75 1788.96,123.81 1783.06,120.27 1777.54,116.18 1772.44,111.56 1767.82,106.46 1763.73,100.94 1760.19,95.04 1757.25,88.82 1754.93,82.34 1753.26,75.67 1752.25,68.87 1751.93,62.25 1751.9,62 1751.9,12.22 20.1,12.22 20.1,735.81 1751.9,735.81
USB_5V on Internal Plane 2 (split plane): 1751.9,686 1751.93,685.75 1752.25,679.13 1753.26,672.33 1754.93,665.66 1757.25,659.18 1760.19,652.96 1763.73,647.06 1767.82,641.54 1772.44,636.44 1777.54,631.82 1783.06,627.73 1788.96,624.19 1795.18,621.25 1801.66,618.93 1808.33,617.26 1811.9,616.73 1811.9,131.27 1808.33,130.74 1801.66,129.07 1795.18,126.75 1788.96,123.81 1783.06,120.27 1777.54,116.18 1772.44,111.56 1767.82,106.46 1763.73,100.94 1760.19,95.04 1757.25,88.82 1754.93,82.34 1753.26,75.67 1752.25,68.87 1751.93,62.25 1751.9,62 1751.9,12.22 107,12.22 107,80.45 1450,80.45 1450.98,80.64 1451.8,81.2 1478.8,108.2 1479.36,109.02 1479.55,110 1479.55,233 1479.36,233.98 1478.8,234.8 1388.55,325.06 1388.55,637.94 1417.8,667.2 1418.36,668.02 1418.55,669 1418.55,735.81 1751.9,735.81
+3.8V on Internal Plane 2 (split plane): 1413.45,670.06 1384.2,640.8 1383.64,639.98 1383.45,639 1383.45,324 1383.64,323.02 1384.2,322.2 1474.45,231.94 1474.45,111.06 1448.94,85.55 107,85.55 107,104 20.1,104 20.1,735.81 1413.45,735.81

## Other copper
Top Layer:
  rectangle net GND: 1414.5,329 1472,428.01
  region net NetL5_P$2: 1369,647 1320,647 1320,566 1369,566
  region net NetL5_P$1: 1518,642 1474,642 1474,575 1518,575
Bottom Layer:
  rectangle net NetJ1_VCC: 1720,490 1810,551
  rectangle net NetL5_P$1: 1465,564 1522,646
  rectangle net NetL5_P$2: 1348,493 1374,566
  rectangle net +3.8V: 895,415.37 1303.63,508
  rectangle net +3.8V: 1303.63,455.37 1375,485.37
  rectangle net NetL5_P$2: 1322,524 1393,637
  rectangle net NetL5_P$1: 1478,496 1508,638
  rectangle net USB_5V: 1494,456 1670,486
  rectangle net GND: 1523,521 1613,551
  rectangle net GND: 1570,521 1613,594
  rectangle net GND: 1403,306 1468,406
  rectangle net GND: 880,326 1318,386
  rectangle net +3.8V: 895,469 1000,539
  rectangle net GND: 880,284 995,359
  rectangle net GND: 1560,554 1619,613
  rectangle net USB_5V: 1630,467 1670,520
  text "HOLOGRAM" at 1370,740 h30 r180
  text "Nova" at 1340,697 h39 r180
  text "1.0 Rev J" at 1510,697 h25 r180
Internal Plane 2 (plane layer: these items are gaps in the copper):
  rectangle: 1,1 107,104
  lines w5: -1,83 1450,83 1477,110 1477,233 1386,324 1386,639 1416,669 1416,745
  lines w10: 295,760 295.29,759.71

## Silkscreen, mask and mechanical layers (free items; w line width, h text height)
Top Overlay:
  lines w6.3: 367.25,66.96 403.96,66.96 ; 447,66 663,66 ; 839,67 1008,67 ; 1051,67 1242.97,67
  lines w8: 1361,311 1480,242 1480,378 ; 1362,244 1480,309 ; 1362,313 1480,379 1421,414 1421,209 1361,244 1361,379 1480,310
  text "HOLOGRAM" at 1270,88 h60
  text "Nova 1.0" at 1270,50 h50
  text "Rev J" at 1270,13 h55
Bottom Overlay:
  lines w5: 480,90 520,90 ; 510,80 520,90 ; 510,100 520,90 ; 450,50 540,50 560,70 560,130 450,130 450,50
  text "SIM_RST" at 770,740 h25 r180
  text "VCC" at 220,700 h25 r180
  text "SIM_CLK" at 980,610 h20 r270
  text "3.8V" at 1140,550 h25 r180
  text "SIM_VSIM" at 840,540 h25 r90
  text "GND" at 1800,360 h25 r90
  text "SIM_IO" at 760,310 h25 r180
  text "USB_5V" at 1420,60 h25 r180
Mechanical 1:
  the board outline again, w10
  text "USB_IN_D_P" at 1508,378 h15 r90
  text "GPIO4" at 1329,286 h20
  text "GPIO3" at 1327,243 h20
  text "GPIO2" at 1328,191 h20
  text "USB_IN_D_N" at 1528,68 h15 r90
  text "RTS" at 695,-63 h20 r90
  text "RXD" at 827,-64 h20 r90
  text "CTS" at 740,-65 h20 r90
  text "TXD" at 784,-68 h20 r90
  text "GND" at 307,-84 h20 r90
  text "1.8 V" at 442,-98.32 h20 r90
  text "RESET" at 1050,-107.99 h20 r90
Mechanical 2:
  circle w5: c1586,639 r3.16
  lines w10: 1772,-7.91 1772,62 cw(c1822,62) 1822,112 1832,112 1832,636 1822,636 cw(c1822,686) 1772,686 1772,755.91 0,755.91 0,-7.87 1772,-7.87
  text "UBLOX_VCC" at 308,592 h15
  text "(+3.8V)" at 287,567 h15
  text "UBLOX_SIM_RST" at 892,562 h15 r270
  text "UBLOX_SIM_CLK" at 1002,552 h15 r270
  text "UBLOX_SIM_VSIM" at 818,540.97 h15 r90
  text "+3.8V" at 1218,522 h15
  text "Ground" at 1690,302 h15 r270
  text "UBLOX_SIM_IO" at 870,270 h15
  text "UBLOX_+1.8V" at 360,90 h15
  text "USB_5V" at 1560,50 h15
Mechanical 3:
  circle w5: c1520,250 r29.15
  circle w5: c1510,340 r29.15
  lines w10: 0,-7.87 1772,-7.87 1772,62 cw(c1822,62) 1822,112 1832,112 1832,636 1822,636 cw(c1822,686) 1772,686 1772,755.91 0,755.91 0,-7.87
  text "USB_IN_D_P" at 1380,380 h25
  text "USB_IN_D_N" at 1410,180 h25
Mechanical 4:
  circle w5: c380,70 r29.15
  circle w5: c250,647 r29.15
  circle w5: c700,317.07 r29.15
  circle w5: c810,580 r29.15
  circle w5: c860,660 r29.15
  circle w5: c940,660 r29.15
  circle w5: c1110,539 r29.15
  circle w5: c1742,351 r29.15
  circle w5: c1741,515 r29.15
  lines w10: 0,-7.87 0,755.91 1772,755.91 1772,686 ccw(c1822,686) 1822,636 1832,636 1832,112 1822,112 ccw(c1822,62) 1772,62 1772,-7.87 0,-7.87
  text "UBLOX_SIM_CLK" at 1220,710 h25
  text "UBLOX_SIM_RST" at 810,650 h25
  text "UBLOX_VCC" at 400,570 h25
  text "UBLOX_SIM_VSIM" at 900,490 h25
  text "+3.8V" at 1160,470 h25
  text "USB_5V" at 1790,450 h25
  text "GND" at 1780,280 h25
  text "UBLOX_SIM_IO" at 830,240 h25
  text "UBLOX_1.8V" at 380,110 h25
Mechanical 16:
  the board outline again, w10
Mechanical 32:
  lines w10: 0,0 1772,0 1772,748 0,748 0,0

## Text inside footprints (layer, text, board x,y; h text height)
J1: Mechanical 17 "PCB Edge" at 1959.9,656.32 h60 r90